# Altium PCB MAIN_PCB.PcbDoc
Units mm, origin at the board's own origin, x right, y up, seen from the top; angles counter-clockwise.
Board outline 312.32 x 200 mm, 2 copper layers (Top Layer, Bottom Layer); 15 components, 0 nets, 166 pads, 0 vias.
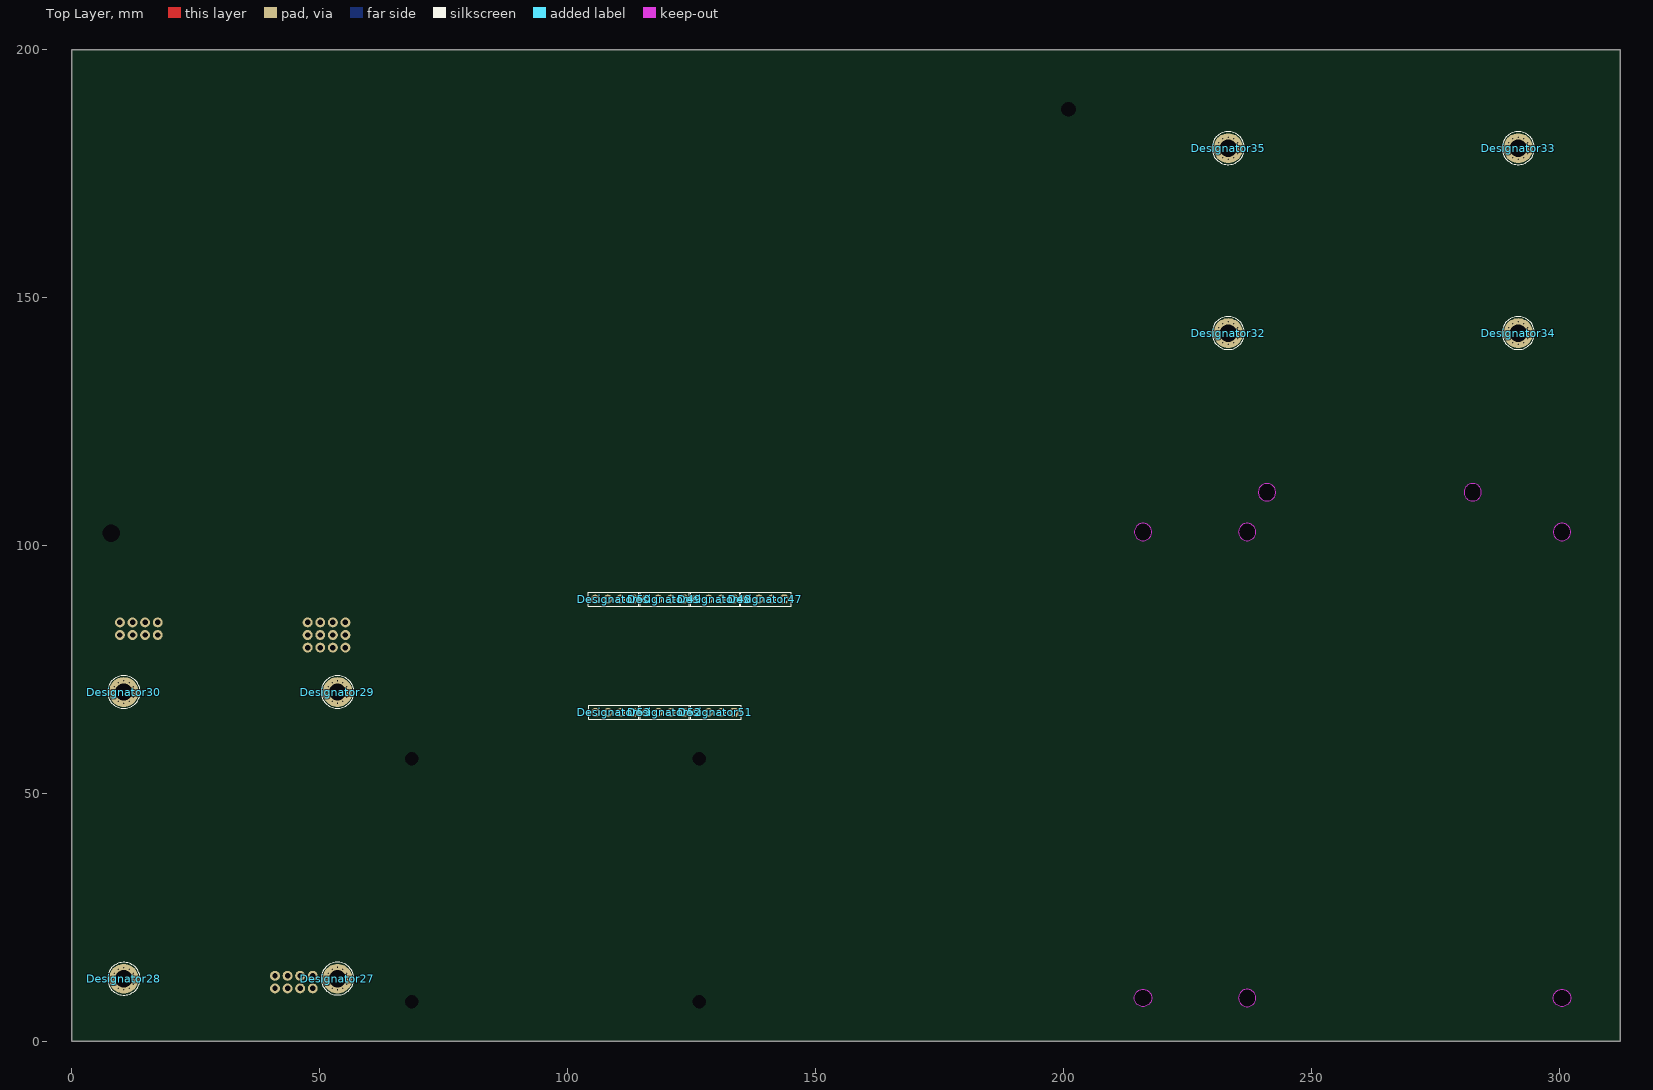
[diagram p0: Top Layer view]
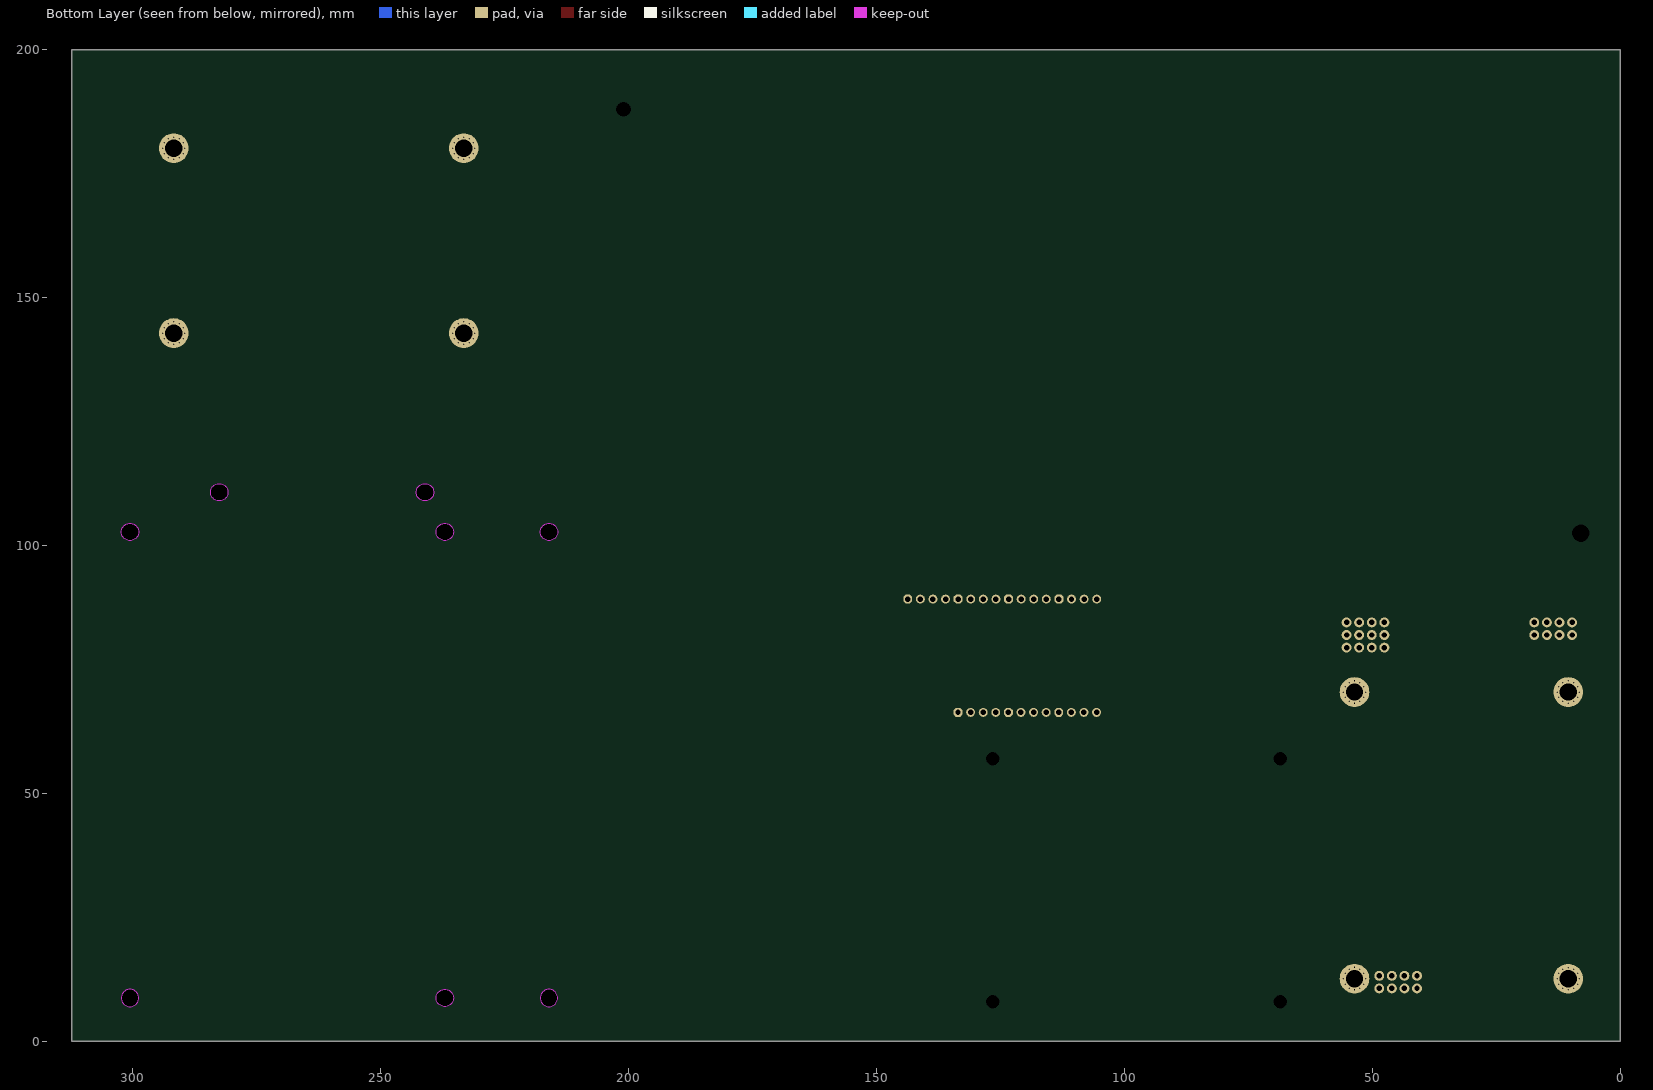
[diagram p1: Bottom Layer view, seen from below]

## Layer stack, top to bottom
Top Solder: solder mask 0.0102, Solder Resist, Dk 3.5
Top Layer: signal copper 0.0356
Dielectric 1: dielectric 0.32, FR-4, Dk 4.8
Bottom Layer: signal copper 0.0356
Bottom Solder: solder mask 0.0102, Solder Resist, Dk 3.5

## Board outline
0,0 312.32,0 312.32,-0.001 312.32,199.999 0,199.999 0,200
cut-out: 217.82,8.75 cw(c216.07,8.75) 216.07,7 cw(c216.07,8.75) 214.32,8.75 cw(c216.07,8.75) 216.07,10.5 cw(c216.07,8.75)
cut-out: 238.82,8.75 ccw(c237.07,8.75) 237.07,10.5 ccw(c237.07,8.75) 235.32,8.75 ccw(c237.07,8.75) 237.07,7 ccw(c237.07,8.75)
cut-out: 302.32,8.75 cw(c300.57,8.75) 300.57,7 cw(c300.57,8.75) 298.82,8.75 cw(c300.57,8.75) 300.57,10.5 cw(c300.57,8.75)
cut-out: 216.07,101 ccw(c216.07,102.75) 217.82,102.75 ccw(c216.07,102.75) 216.07,104.5 ccw(c216.07,102.75) 214.32,102.75 ccw(c216.07,102.75)
cut-out: 237.07,101 ccw(c237.07,102.75) 238.82,102.75 ccw(c237.07,102.75) 237.07,104.5 ccw(c237.07,102.75) 235.32,102.75 ccw(c237.07,102.75)
cut-out: 241.07,109 ccw(c241.07,110.75) 242.82,110.75 ccw(c241.07,110.75) 241.07,112.5 ccw(c241.07,110.75) 239.32,110.75 ccw(c241.07,110.75)
cut-out: 282.57,109 ccw(c282.57,110.75) 284.32,110.75 ccw(c282.57,110.75) 282.57,112.5 ccw(c282.57,110.75) 280.82,110.75 ccw(c282.57,110.75)
cut-out: 300.57,101 ccw(c300.57,102.75) 302.32,102.75 ccw(c300.57,102.75) 300.57,104.5 ccw(c300.57,102.75) 298.82,102.75 ccw(c300.57,102.75)

## Design rules (kind name [scope] priority, off if disabled: settings)
Clearance [All] p1: gap=0.254 ignorepadtopadclearanceinfootprint=FALSE except(0: Arc-Hole Track-Hole SMDPad-Hole THPad-Hole Via-Hole Fill-Hole Poly-Hole Region-Hole Text-Hole)
PolygonConnect [All] p1: connectstyle=Relief reliefconductorwidth=0.254 reliefentries=4 polygonreliefangle="90 Angle" airgapwidth=0.254
RoutingVias [All] p1: holewidth=0.711 width=1.27 viastyle="Through Hole" minholewidth=0.711 minwidth=1.27 maxholewidth=0.711 maxwidth=1.27
SolderMaskExpansion [All] p1: expansion=0.102 istentingtop=FALSE
Width [All] p1: maxlimit=0.254 minlimit=0.254 preferedwidth=0.254
30 further rules are at their usual default settings.

## Components (designator, comment, footprint, x,y, rotation, side; value= is the part's Value field where it differs from the comment)
Designator27 "Comment" "CON: PADS 1x3mm" 53.6,12.65 r90 top
Designator28 "Comment" "CON: PADS 1x3mm" 10.5,12.625 r90 top
Designator29 "Comment" "CON: PADS 1x3mm" 53.6,70.461 r90 top
Designator30 "Comment" "CON: PADS 1x3mm" 10.5,70.461 r90 top
Designator32 "Comment" "CON: PADS 1x3mm" 233.25,142.85 r90 top
Designator33 "Comment" "CON: PADS 1x3mm" 291.75,180.15 r270 top
Designator34 "Comment" "CON: PADS 1x3mm" 291.75,142.85 r90 top
Designator35 "Comment" "CON: PADS 1x3mm" 233.25,180.15 r270 top
Designator47 "Comment" "CON: PBS-4" 139.89,89.2 r180 top
Designator48 "Comment" "CON: PBS-4" 129.73,89.2 r180 top
Designator49 "Comment" "CON: PBS-4" 119.57,89.2 r180 top
Designator50 "Comment" "CON: PBS-4" 109.41,89.2 r180 top
Designator51 "Comment" "CON: PBS-4" 129.76,66.35 r180 top
Designator52 "Comment" "CON: PBS-4" 119.6,66.35 r180 top
Designator53 "Comment" "CON: PBS-4" 109.44,66.35 r180 top

## Footprints (in the part's own frame and the unit in brackets; to place one, negate y for a bottom-side part, rotate by r counter-clockwise, add the part's x,y. Pads: shape width x height; smd on the part's side, far side on the other; paste and mask are expansions set on the pad)
"CON: PADS 1x3mm" [mm]
  round 0.7 hole 0.3: 1(-2.25,0) 1(-1.9,-1.1) 1(-1.9,1.1) 1(-1.1,1.9) 1(-1.1,-1.9) 1(0,2.25) 1(0,-2.25) 1(1.1,1.9) 1(1.1,-1.9) 1(1.9,-1.1) 1(1.9,1.1) 1(2.25,0)
  round 6 hole 3.5: ""(0,0)
  silkscreen extent -3.3,-3.3 3.3,3.3
"CON: PBS-4" [mm] "PBS-5"
  oct 1.8x1.8 hole 1.1: 1(-3.81,0)
  round 1.8 hole 1.1: 2(-1.27,0) 3(1.27,0) 4(3.81,0)
  silkscreen extent -5.23,-1.4 5.2,1.4, body extent -5.08,-1.27 5.08,1.27, height 8.4

## Free pads (board coordinates)
  round 2 hole 3.5: ""(8,102.5)
  round 2 hole 1.1: ""(9.72,81.96) ""(9.72,84.5) ""(12.26,84.5) ""(12.26,81.96) ""(14.8,81.96) ""(14.8,84.5) ""(17.34,81.96) ""(17.34,84.5) ""(40.99,10.68) ""(40.99,13.22) ""(43.53,10.68) ""(43.53,13.22) ""(46.07,13.22) ""(46.07,10.68) ""(47.58,84.5) ""(47.58,81.96) ""(47.58,79.42) ""(48.61,10.68) ""(48.61,13.22) ""(50.12,84.5) ""(50.12,81.96) ""(50.12,79.42) ""(52.66,84.5) ""(52.66,81.96) ""(52.66,79.42) ""(55.2,84.5) ""(55.2,81.96) ""(55.2,79.42)
  round 2 hole 2.7: ""(68.57,8) ""(68.57,57) ""(126.57,8) ""(126.57,57)
  round 2 hole 3: ""(201,188)

## Nets (pads, with @x,y where several pads share a name; then routed paths per layer and width w, separated by ;. In a path a pad name is that pad's centre, name@x,y a point inside that pad or via, vN(x,y) a via of type N, cw(c..) or ccw(c..) an arc to the next point about the centre after c; other vN are vias at no path point)
pads on no net: Designator27. Designator27.1 Designator28. Designator28.1 Designator29. Designator29.1 Designator30. Designator30.1 Designator32. Designator32.1 Designator33. Designator33.1 Designator34. Designator34.1 Designator35. Designator35.1 Designator47.1 Designator47.2 Designator47.3 Designator47.4 Designator48.1 Designator48.2 Designator48.3 Designator48.4 Designator49.1 Designator49.2 Designator49.3 Designator49.4 Designator50.1 Designator50.2 Designator50.3 Designator50.4 Designator51.1 Designator51.2 Designator51.3 Designator51.4 Designator52.1 Designator52.2 Designator52.3 Designator52.4 Designator53.1 Designator53.2 Designator53.3 Designator53.4

## Silkscreen, mask and mechanical layers (free items; w line width, h text height)
Border:
  region: 295,138 295,185 230,185 230,138
  rectangle: 212.32,5 307.32,113
  rectangle: 96.67,65 150.07,90.5
  rectangle: 65.07,4.5 150.07,60.5
  rectangle: 6.96,9.2 57.1,86.85
  rectangle: 5,96 204,195
Inside:
  circle w0.1: c300.57,8.75 r1.75
  circle w0.1: c300.57,102.75 r1.75
  circle w0.1: c282.57,110.75 r1.75
  circle w0.1: c241.07,110.75 r1.75
  circle w0.1: c237.07,102.75 r1.75
  circle w0.1: c216.07,102.75 r1.75
  circle w0.1: c216.07,8.75 r1.75
  circle w0.1: c237.07,8.75 r1.75
  pour cut-out: 302.32,8.75 cw(c300.57,8.75) 300.57,7 cw(c300.57,8.75) 298.82,8.75 cw(c300.57,8.75) 300.57,10.5 cw(c300.57,8.75)
Area:
  lines w0.2: 0,199.999 312.32,199.999 312.32,-0.001 ; 0,200 0,0 312.32,0

## Dimensions
0,199.999 to 312.32,199.999 on Size
0,0 to 0,200 on Size